# Altium PCB dsp.PcbDoc
Units mil, origin at the board's own origin, x right, y up, seen from the top; angles counter-clockwise.
Board outline 6000 x 4000 mil, 2 copper layers (Top Layer, Bottom Layer); 33 components, 33 nets, 293 pads, 0 vias.
Unrouted connection lines stored in the file: 106.
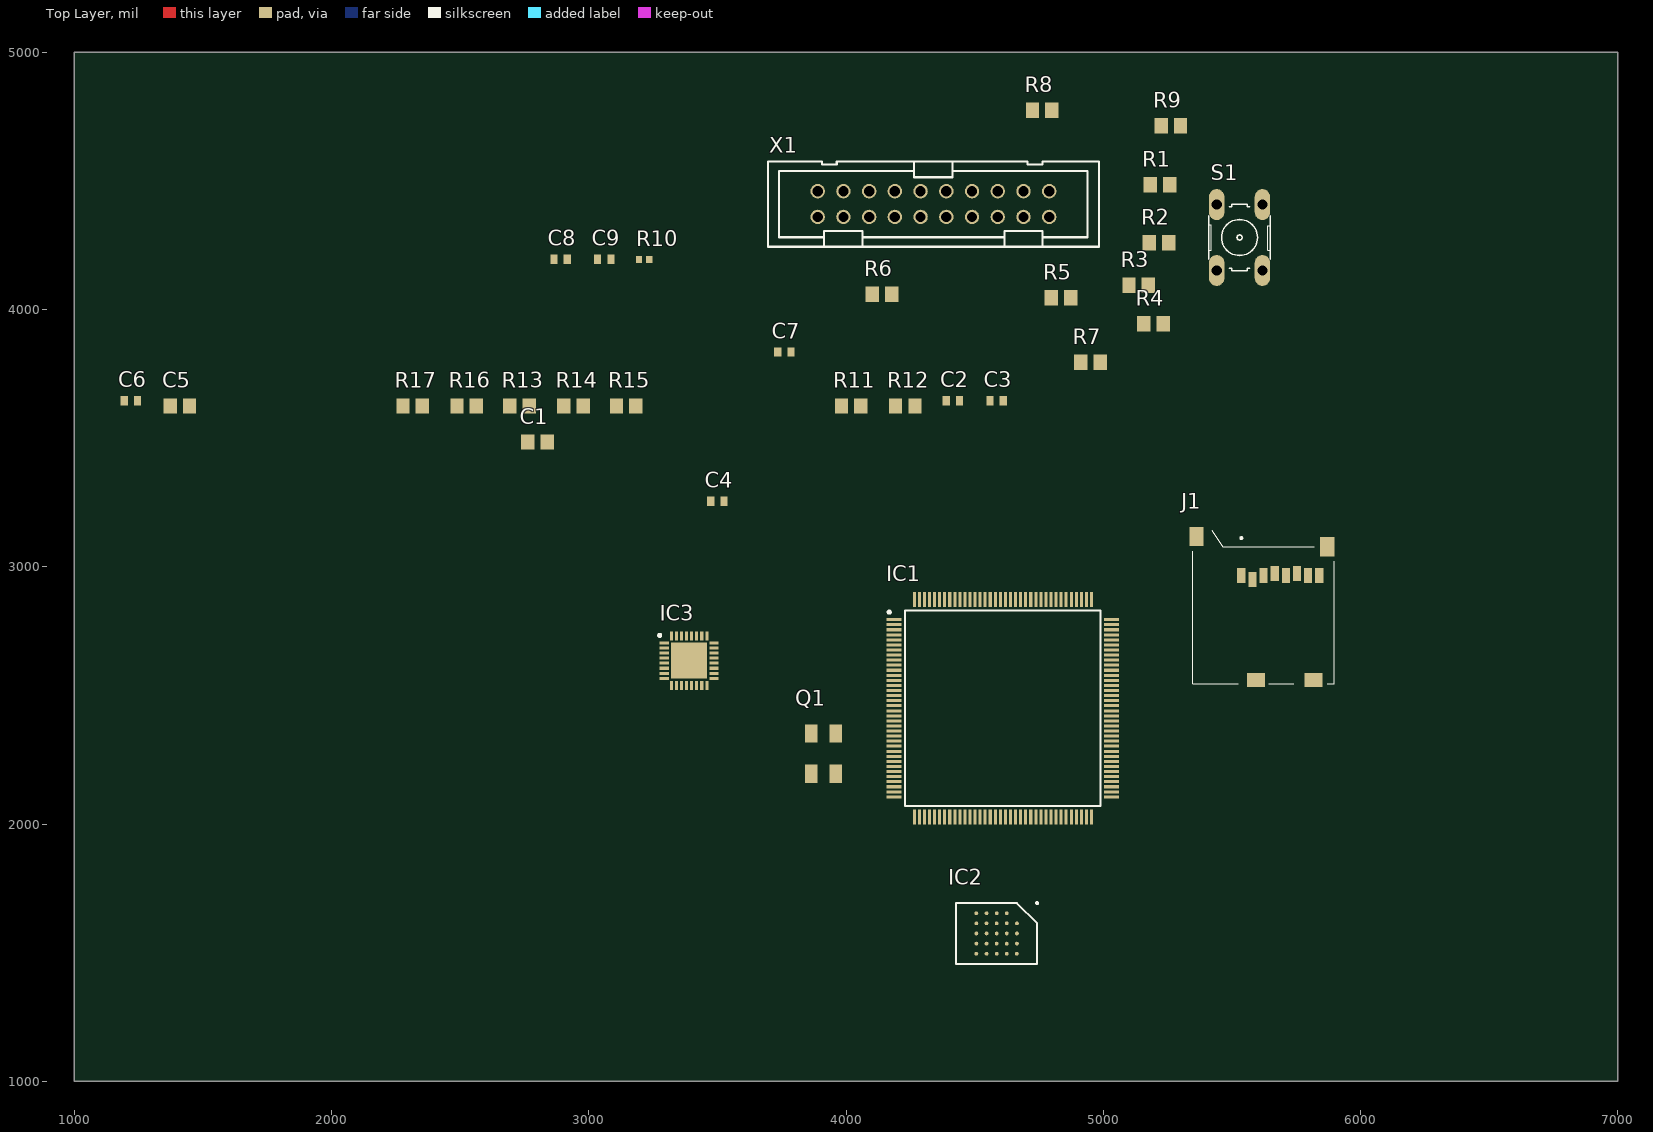
[diagram p0: Top Layer view]
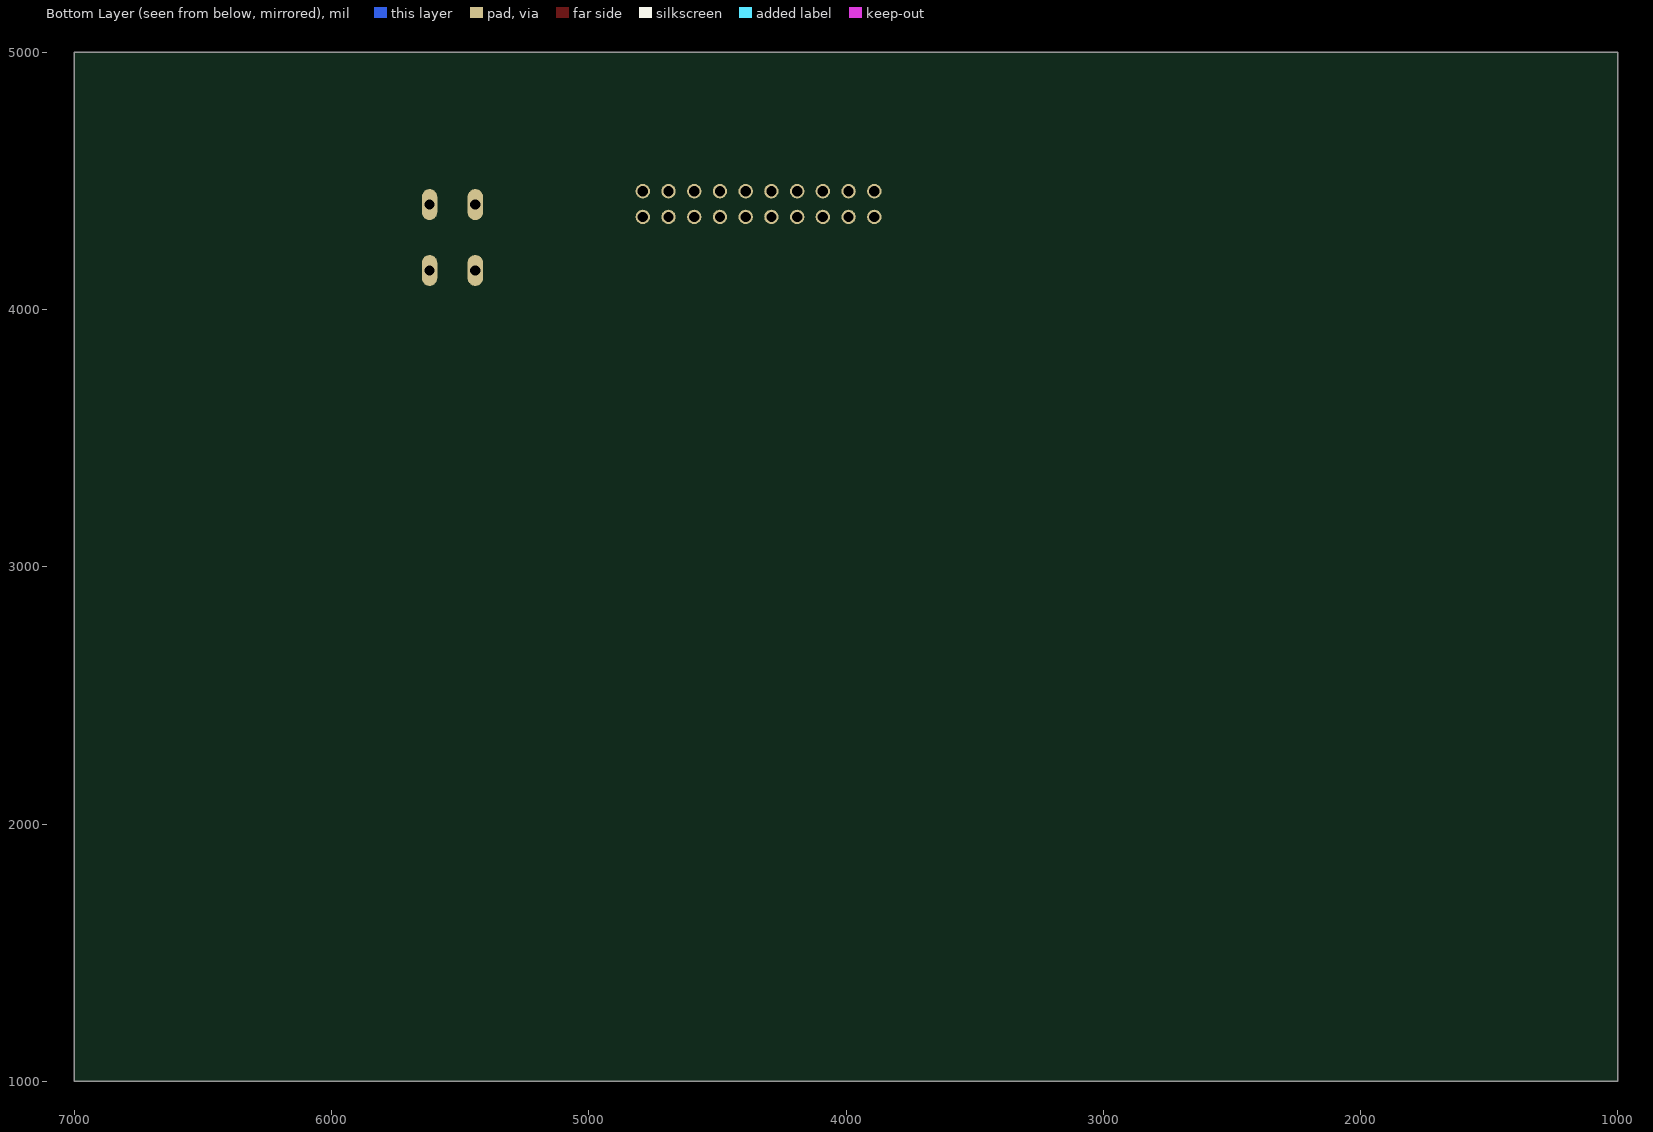
[diagram p1: Bottom Layer view, seen from below]

## Layer stack, top to bottom
Top Solder: solder mask 0.4, Solder Resist, Dk 3.5
Top Layer: signal copper 1.4
Dielectric 1: dielectric 12.6, FR-4, Dk 4.8
Bottom Layer: signal copper 1.4
Bottom Solder: solder mask 0.4, Solder Resist, Dk 3.5

## Board outline
1000,1000 7000,1000 7000,5000 1000,5000

## Design rules (kind name [scope] priority, off if disabled: settings)
Clearance [All] p1: gap=10 ignorepadtopadclearanceinfootprint=FALSE except(0: Arc-Hole Track-Hole SMDPad-Hole THPad-Hole Via-Hole Fill-Hole Poly-Hole Region-Hole Text-Hole)
PolygonConnect [All] p1: connectstyle=Relief reliefconductorwidth=10 reliefentries=4 polygonreliefangle="90 Angle" airgapwidth=10
RoutingVias [All] p1: holewidth=28 width=50 viastyle="Through Hole" minholewidth=28 minwidth=50 maxholewidth=28 maxwidth=50
SolderMaskExpansion [All] p1: expansion=4 istentingtop=FALSE
Width [All] p1: maxlimit=10 minlimit=10 preferedwidth=10
30 further rules are at their usual default settings.

## Classes and differential pairs
component class microcontroller: C7 C8 C9 IC1 Q1 Q? R1 R2 R3 R4 R5 R6 R7 R8 R9 R10 S1 S? X1
component class memory: C1 C2 C3 C4 C5 C6 IC2 IC3 J1 R11 R12 R13 R14 R15 R16 R17

## Components (designator, comment, footprint, x,y, rotation, side; value= is the part's Value field where it differs from the comment)
C1 "4.7u" C0805 2800,3485 r0 top
C2 "Capacitor" C0402 4415,3645 r0 top value=100nF
C3 "Capacitor" C0402 4585,3645 r0 top value=100nF
C4 "Capacitor" C0402 3500,3255 r0 top value=100nF
C5 "4.7u" C0805 1410,3625 r0 top
C6 "Capacitor" C0402 1220,3645 r0 top value=100nF
C7 "100n" C0402 3760,3835 r0 top
C8 "20p" C0402 2890,4195 r0 top
C9 "20p" C0402 3060,4195 r0 top
IC1 "STM32H5E5ZJT6" QFP50P2200X2200X160-144N 4610,2450 r0 top
IC2 "S70KL1282DPBHI020" BGA24C100P5X5_600X800X100 4585.63,1574.37 r270 top
IC3 "TLV320AIC3104IRHBT" QFN50P500X500X100-33N-D 3390,2635 r0 top
J1 "2908-05WB-MG" 290805WBMG 5617.01,2843.7 r0 top
Q1 "ABM3B" ABM3B 3841,2388 r270 top
R1 "10k" R0805 5220,4485 r0 top
R2 "10k" R0805 5217,4260 r0 top
R3 "10k" R0805 5137.4,4095 r0 top
R4 "10k" R0805 5195,3945 r0 top
R5 "10k" R0805 4835,4045 r0 top
R6 "10k" R0805 4140,4060 r0 top
R7 "10k" R0805 4950,3795 r0 top
R8 "10k" R0805 4762.4,4775 r0 top
R9 "10k" R0805 5262.4,4715 r0 top
R10 "1M" R0402 3215,4195 r0 top
R11 "10k" R0805 4020,3625 r0 top
R12 "10k" R0805 4230,3625 r0 top
R13 "47k" R0805 2730,3625 r0 top
R14 "47k" R0805 2940,3625 r0 top
R15 "47k" R0805 3145,3625 r0 top
R16 "47k" R0805 2525,3625 r0 top
R17 "47k" R0805 2315,3625 r0 top
S1 "10-XX" B3F-10XX 5530,4280 r90 top
X1 "2520-" PAK100/2500-20 4340,4410 r180 top

## Footprints (in the part's own frame and the unit in brackets; to place one, negate y for a bottom-side part, rotate by r counter-clockwise, add the part's x,y. Pads: shape width x height; smd on the part's side, far side on the other; paste and mask are expansions set on the pad)
290805WBMG [mm]
  rect 0.8x1.5 smd: 1(-2.04,3.1) 2(-0.94,2.7) 3(0.16,3.1) 4(1.26,3.3) 5(2.36,3.1) 6(3.46,3.3) 7(4.56,3.1) 8(5.66,3.1)
  rect 1.4x1.9 smd: MP1(6.45,5.95) MP4(-6.45,6.95)
  rect 1.8x1.4 smd: MP2(5.1,-7.2) MP3(-0.6,-7.2)
  silkscreen extent -6.85,-7.6 7.15,7.6, body extent -7,-7.6 7,7.6, height 1.85
ABM3B [mil]
  rect 71x48 smd: P$1(36,24) P$2(193,24) P$3(193,119) P$4(36,119)
B3F-10XX [mil]
  oval 120x60 hole 40: 1(-128,89) 2(128,89) 3(-128,-89) 4(128,-89)
  silkscreen extent -130,-120 130,120
BGA24C100P5X5_600X800X100 [mm]
  round 0.37 smd: A2(-1,2) A3(0,2) A4(1,2) A5(2,2) B1(-2,1) B2(-1,1) B3(0,1) B4(1,1) B5(2,1) C1(-2,0) C2(-1,0) C3(0,0) C4(1,0) C5(2,0) D1(-2,-1) D2(-1,-1) D3(0,-1) D4(1,-1) D5(2,-1) E1(-2,-2) E2(-1,-2) E3(0,-2) E4(1,-2) E5(2,-2)
  silkscreen extent -3.1,-4 3,4.1, body extent -3,-4 3,4, height 1
C0402 [mil]
  rect 28x36 smd: 1(-25.59,0) 2(26,0)
C0805 [mil]
  rect 52x60 smd: 1(-37.4,0) 2(38,0)
PAK100/2500-20 [mil]
  round 56 hole 40: 1(-450,-50) 2(-450,50) 3(-350,-50) 4(-350,50) 5(-250,-50) 6(-250,50) 7(-150,-50) 8(-150,50) 9(-50,-50) 10(-50,50) 11(50,-50) 12(50,50) 13(150,-50) 14(150,50) 15(250,-50) 16(250,50) 17(350,-50) 18(350,50) 19(450,-50) 20(450,50)
  silkscreen extent -644,-165 644,166
QFN50P500X500X100-33N-D [mm]
  rect 0.9x0.3 smd: 1(-2.45,1.75) 2(-2.45,1.25) 3(-2.45,0.75) 4(-2.45,0.25) 5(-2.45,-0.25) 6(-2.45,-0.75) 7(-2.45,-1.25) 8(-2.45,-1.75) 17(2.45,-1.75) 18(2.45,-1.25) 19(2.45,-0.75) 20(2.45,-0.25) 21(2.45,0.25) 22(2.45,0.75) 23(2.45,1.25) 24(2.45,1.75)
  rect 0.3x0.9 smd: 9(-1.75,-2.45) 10(-1.25,-2.45) 11(-0.75,-2.45) 12(-0.25,-2.45) 13(0.25,-2.45) 14(0.75,-2.45) 15(1.25,-2.45) 16(1.75,-2.45) 25(1.75,2.45) 26(1.25,2.45) 27(0.75,2.45) 28(0.25,2.45) 29(-0.25,2.45) 30(-0.75,2.45) 31(-1.25,2.45) 32(-1.75,2.45)
  rect 3.55x3.55 smd: 33(0,0)
  silkscreen extent -3.02,2.38 -2.77,2.62, body extent -2.5,-2.5 2.5,2.5, height 1
QFP50P2200X2200X160-144N [mm]
  rect 1.475x0.3 smd: 1(-10.738,8.75) 2(-10.738,8.25) 3(-10.738,7.75) 4(-10.738,7.25) 5(-10.738,6.75) 6(-10.738,6.25) 7(-10.738,5.75) 8(-10.738,5.25) 9(-10.738,4.75) 10(-10.738,4.25) 11(-10.738,3.75) 12(-10.738,3.25) 13(-10.738,2.75) 14(-10.738,2.25) 15(-10.738,1.75) 16(-10.738,1.25) 17(-10.738,0.75) 18(-10.738,0.25) 19(-10.738,-0.25) 20(-10.738,-0.75) 21(-10.738,-1.25) 22(-10.738,-1.75) 23(-10.738,-2.25) 24(-10.738,-2.75) 25(-10.738,-3.25) 26(-10.738,-3.75) 27(-10.738,-4.25) 28(-10.738,-4.75) 29(-10.738,-5.25) 30(-10.738,-5.75) 31(-10.738,-6.25) 32(-10.738,-6.75) 33(-10.738,-7.25) 34(-10.738,-7.75) 35(-10.738,-8.25) 36(-10.738,-8.75) 73(10.738,-8.75) 74(10.738,-8.25) 75(10.738,-7.75) 76(10.738,-7.25) 77(10.738,-6.75) 78(10.738,-6.25) 79(10.738,-5.75) 80(10.738,-5.25) 81(10.738,-4.75) 82(10.738,-4.25) 83(10.738,-3.75) 84(10.738,-3.25) 85(10.738,-2.75) 86(10.738,-2.25) 87(10.738,-1.75) 88(10.738,-1.25) 89(10.738,-0.75) 90(10.738,-0.25) 91(10.738,0.25) 92(10.738,0.75) 93(10.738,1.25) 94(10.738,1.75) 95(10.738,2.25) 96(10.738,2.75) 97(10.738,3.25) 98(10.738,3.75) 99(10.738,4.25) 100(10.738,4.75) 101(10.738,5.25) 102(10.738,5.75) 103(10.738,6.25) 104(10.738,6.75) 105(10.738,7.25) 106(10.738,7.75) 107(10.738,8.25) 108(10.738,8.75)
  rect 0.3x1.475 smd: 37(-8.75,-10.738) 38(-8.25,-10.738) 39(-7.75,-10.738) 40(-7.25,-10.738) 41(-6.75,-10.738) 42(-6.25,-10.738) 43(-5.75,-10.738) 44(-5.25,-10.738) 45(-4.75,-10.738) 46(-4.25,-10.738) 47(-3.75,-10.738) 48(-3.25,-10.738) 49(-2.75,-10.738) 50(-2.25,-10.738) 51(-1.75,-10.738) 52(-1.25,-10.738) 53(-0.75,-10.738) 54(-0.25,-10.738) 55(0.25,-10.738) 56(0.75,-10.738) 57(1.25,-10.738) 58(1.75,-10.738) 59(2.25,-10.738) 60(2.75,-10.738) 61(3.25,-10.738) 62(3.75,-10.738) 63(4.25,-10.738) 64(4.75,-10.738) 65(5.25,-10.738) 66(5.75,-10.738) 67(6.25,-10.738) 68(6.75,-10.738) 69(7.25,-10.738) 70(7.75,-10.738) 71(8.25,-10.738) 72(8.75,-10.738) 109(8.75,10.738) 110(8.25,10.738) 111(7.75,10.738) 112(7.25,10.738) 113(6.75,10.738) 114(6.25,10.738) 115(5.75,10.738) 116(5.25,10.738) 117(4.75,10.738) 118(4.25,10.738) 119(3.75,10.738) 120(3.25,10.738) 121(2.75,10.738) 122(2.25,10.738) 123(1.75,10.738) 124(1.25,10.738) 125(0.75,10.738) 126(0.25,10.738) 127(-0.25,10.738) 128(-0.75,10.738) 129(-1.25,10.738) 130(-1.75,10.738) 131(-2.25,10.738) 132(-2.75,10.738) 133(-3.25,10.738) 134(-3.75,10.738) 135(-4.25,10.738) 136(-4.75,10.738) 137(-5.25,10.738) 138(-5.75,10.738) 139(-6.25,10.738) 140(-6.75,10.738) 141(-7.25,10.738) 142(-7.75,10.738) 143(-8.25,10.738) 144(-8.75,10.738)
  silkscreen extent -11.35,-9.65 9.65,9.65, body extent -11,-11 11,11, height 1.6
R0402 [mil]
  rect 24x28 smd: 1(-19.68,0) 2(20,0)
R0805 [mil]
  rect 52x60 smd: 1(-37.4,0) 2(38,0)

## Part data
C1 C5: library part C-EUC0805, SPICEPREFIX=C
C2 C3 C4 C6: library part MCD-00102, "Capacitor, MLCC, 100nF, 16V, X7R, 10%, 0402, T=0,5mm", Alternate_Manufacturer=MURATA, Alternate_Manufacturer_Part_Number=GCM155R71C104KA55D, Manufacturer=YAGEO, Manufacturer_Part_Number=CC0402KRX7R7BB104, Package=C0402, ComponentLink1Description=Datasheet, ComponentLink1URL=http://tunmcdsvn.tun.st.com/Component_Datasheet_Library/Trunk/Capacitors/Yageo_Multilayer_Capacitor_X7R_series_100pF_to_22uF, ECCN_EU=NEC, ECCN_US=EAR99, Internal_Part_Number=MCD-00102, Part_Type=Capacitor, Provided_By=SUBCO, Status=Released
C7 C8 C9: library part C-EUC0402, "<B>CAPACITOR</B>, European symbol", SPICEPREFIX=C
IC1: "Integrated Circuit", Manufacturer_Name=STMicroelectronics, Arrow Part Number=STM32H5E5ZJT6, Arrow Price/Stock=https://www.arrow.com/en/products/stm32h5e5zjt6/stmicroelectronics.html?utm_currency=USD&region=nac, Datasheet Link=https://www.st.com/resource/en/datasheet/stm32h5e4vj.pdf, Height=1.6mm, Manufacturer_Part_Number=STM32H5E5ZJT6
IC2: "Integrated Circuit", Manufacturer_Name=Infineon, Mouser Part Number=727-70KL1282DPBHI020, Datasheet Link=https://www.cypress.com/file/501841/download, Height=1mm, Manufacturer_Part_Number=S70KL1282DPBHI020, Mouser Price/Stock=https://www.mouser.co.uk/ProductDetail/Infineon-Technologies/S70KL1282DPBHI020?qs=DPoM0jnrROVgAEZ0o2TpIw%3D%3D
IC3: "Integrated Circuit", Manufacturer_Name="Texas Instruments", Mouser Part Number=595-TLV320C3104IRHBT, Arrow Part Number=TLV320AIC3104IRHBT, Arrow Price/Stock=https://www.arrow.com/en/products/tlv320aic3104irhbt/texas-instruments.html?utm_currency=USD&region=nac, Datasheet Link=http://www.ti.com/lit/gpn/tlv320aic3104, Height=1mm, Manufacturer_Part_Number=TLV320AIC3104IRHBT, Mouser Price/Stock=https://www.mouser.co.uk/ProductDetail/Texas-Instruments/TLV320AIC3104IRHBT?qs=t6sYTo5dwUz0wA7yRaTR5Q%3D%3D
J1: "Connector", Manufacturer_Name=3M, Mouser Part Number=517-2908-05WB-MG, Arrow Part Number=2908-05WB-MG, Arrow Price/Stock=https://www.arrow.com/en/products/2908-05wb-mg/3m.html?utm_currency=USD&region=europe, Datasheet Link=https://componentsearchengine.com/Datasheets/1/2908-05WB-MG.pdf, Height=1.85mm, Manufacturer_Part_Number=2908-05WB-MG, Mouser Price/Stock=https://www.mouser.co.uk/ProductDetail/3M-Electronic-Solutions-Division/2908-05WB-MG?qs=vnwGVgFuQiZPJoOt79ALlw%3D%3D
R1 R2 R3 R4 R5 R6 R7 R8 R9 R11 R12 R13 R14 R15 R16 R17: library part R-EU_R0805, "<B>RESISTOR</B>, European symbol"
R10: library part R-EU_R0402, "<B>RESISTOR</B>, European symbol"
S1: "<b>OMRON SWITCH</b>", MPN=B3F-1000, OC_FARNELL=176432, OC_NEWARK=36M3542
X1: "<b>3M (TM) Pak 100 4-Wall Header</b><p> / Source: 3M", OC_FARNELL=unknown, OC_NEWARK=unknown

## Nets (pads, with @x,y where several pads share a name; then routed paths per layer and width w, separated by ;. In a path a pad name is that pad's centre, name@x,y a point inside that pad or via, vN(x,y) a via of type N, cw(c..) or ccw(c..) an arc to the next point about the centre after c; other vN are vias at no path point)
+3V3: C1.1 C2.2 C3.2 C4.2 C5.1 C6.2 IC2.B4 IC2.D1 IC2.E4 J1.4 R1.2 R2.2 R3.2 R6.1 R7.1 R11.2 R12.2 R13.2 R14.2 R15.2 R16.2 R17.2 X1.1 X1.2
DGND: C1.2 C2.1 C3.1 C4.1 C5.2 C6.1 C7.2 C8.2 C9.2 IC2.B1 IC2.B3 IC2.C1 IC2.E5 J1.6 J1.MP1 J1.MP3 J1.MP4 Q1.P$2 Q1.P$4 R4.1 R5.1 R8.1 R9.1 S1.1 S1.2 X1.4 X1.6 X1.8 X1.10 X1.12 X1.14 X1.16 X1.18 X1.20
JNTRST: IC1.134 R1.1 X1.3
JTCLK: IC1.109 R4.2 X1.9
JTDI: IC1.110 R2.1 X1.5
JTDO: IC1.133 R6.2 X1.13
JTMS: IC1.105 R3.1 X1.7
NetC8_1: C8.1 IC1.23 Q1.P$1 R10.2
NetC9_1: C9.1 IC1.24 Q1.P$3 R10.1
NetR5_2: R5.2 X1.11
NetR8_2: R8.2 X1.17
NetR9_2: R9.2 X1.19
OCTO_CLK: IC1.48 IC2.B2
OCTO_DQS: IC1.45 IC2.C3
OCTO_IO0: IC1.47 IC2.D3
OCTO_IO1: IC1.46 IC2.D2
OCTO_IO2: IC1.43 IC2.C4
OCTO_IO3: IC1.42 IC2.D4
OCTO_IO4: IC1.58 IC2.D5
OCTO_IO5: IC1.59 IC2.E3
OCTO_IO6: IC1.60 IC2.E2
OCTO_IO7: IC1.63 IC2.E1
OCTO_NCS: IC1.64 IC2.A3 R12.1
OCTO_RESET: IC1.65 IC2.A4 R11.1
RESET: C7.1 IC1.25 R7.2 S1.3 S1.4 X1.15
SD_CARD_DET: IC1.114 J1.MP2
SD_CLK: IC1.113 J1.5
SD_CMD: IC1.116 J1.3 R15.1
SD_D0: IC1.102 J1.7 R16.1
SD_D1: IC1.99 J1.8 R17.1
SD_D2: IC1.111 J1.1 R13.1
SD_D3: IC1.112 J1.2 R14.1
SD_RESET: IC1.115
pads on no net: IC1.1 IC1.2 IC1.3 IC1.4 IC1.5 IC1.6 IC1.7 IC1.8 IC1.9 IC1.10 IC1.11 IC1.12 IC1.13 IC1.14 IC1.15 IC1.16 IC1.17 IC1.18 IC1.19 IC1.20 IC1.21 IC1.22 IC1.26 IC1.27 IC1.28 IC1.29 IC1.30 IC1.31 IC1.32 IC1.33 IC1.34 IC1.35 IC1.36 IC1.37 IC1.38 IC1.39 IC1.40 IC1.41 IC1.44 IC1.49 IC1.50 IC1.51 IC1.52 IC1.53 IC1.54 IC1.55 IC1.56 IC1.57 IC1.61 IC1.62 IC1.66 IC1.67 IC1.68 IC1.69 IC1.70 IC1.71 IC1.72 IC1.73 IC1.74 IC1.75 IC1.76 IC1.77 IC1.78 IC1.79 IC1.80 IC1.81 IC1.82 IC1.83 IC1.84 IC1.85 IC1.86 IC1.87 IC1.88 IC1.89 IC1.90 IC1.91 IC1.92 IC1.93 IC1.94 IC1.95 IC1.96 IC1.97 IC1.98 IC1.100 IC1.101 IC1.103 IC1.104 IC1.106 IC1.107 IC1.108 IC1.117 IC1.118 IC1.119 IC1.120 IC1.121 IC1.122 IC1.123 IC1.124 IC1.125 IC1.126 IC1.127 IC1.128 IC1.129 IC1.130 IC1.131 IC1.132 IC1.135 IC1.136 IC1.137 IC1.138 IC1.139 IC1.140 IC1.141 IC1.142 IC1.143 IC1.144 IC2.A2 IC2.A5 IC2.B5 IC2.C2 IC2.C5 IC3.1 IC3.2 IC3.3 IC3.4 IC3.5 IC3.6 IC3.7 IC3.8 IC3.9 IC3.10 IC3.11 IC3.12 IC3.13 IC3.14 IC3.15 IC3.16 IC3.17 IC3.18 IC3.19 IC3.20 IC3.21 IC3.22 IC3.23 IC3.24 IC3.25 IC3.26 IC3.27 IC3.28 IC3.29 IC3.30 IC3.31 IC3.32 IC3.33

## Text inside footprints (layer, text, board x,y; h text height)
S1: Mechanical 16 "4" at 5640,4420 h77.5 r90; Mechanical 16 "3" at 5640,4100 h77.5 r90; Mechanical 16 "2" at 5470,4420 h77.5 r90; Mechanical 16 "1" at 5465,4110 h77.5 r90